# Altium PCB Header-Male-2.54_2x20.pcbdoc
Units mm, origin at the board's own origin, x right, y up, seen from the top; angles counter-clockwise.
Board outline 63.56 x 17.8 mm, 2 copper layers (Top Layer, Bottom Layer), stack 0 mm thick; 1 components, 0 nets, 40 pads, 0 vias.
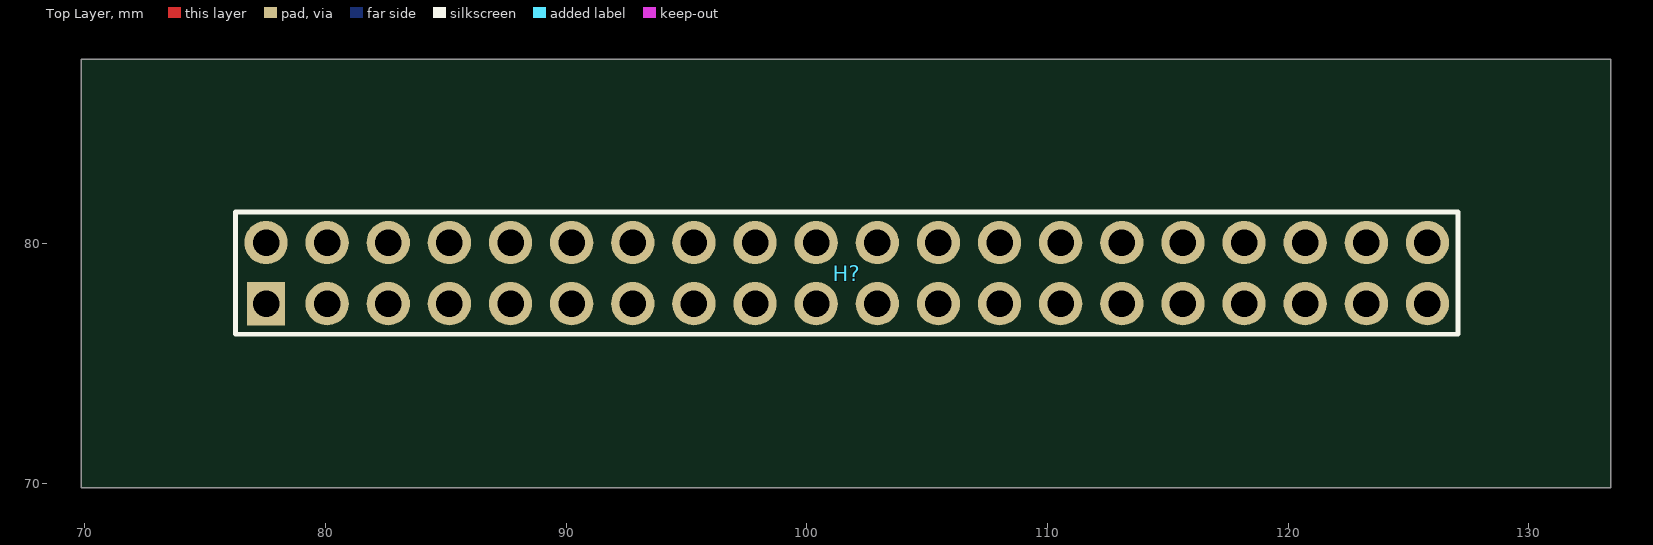
[diagram p0: Top Layer view]
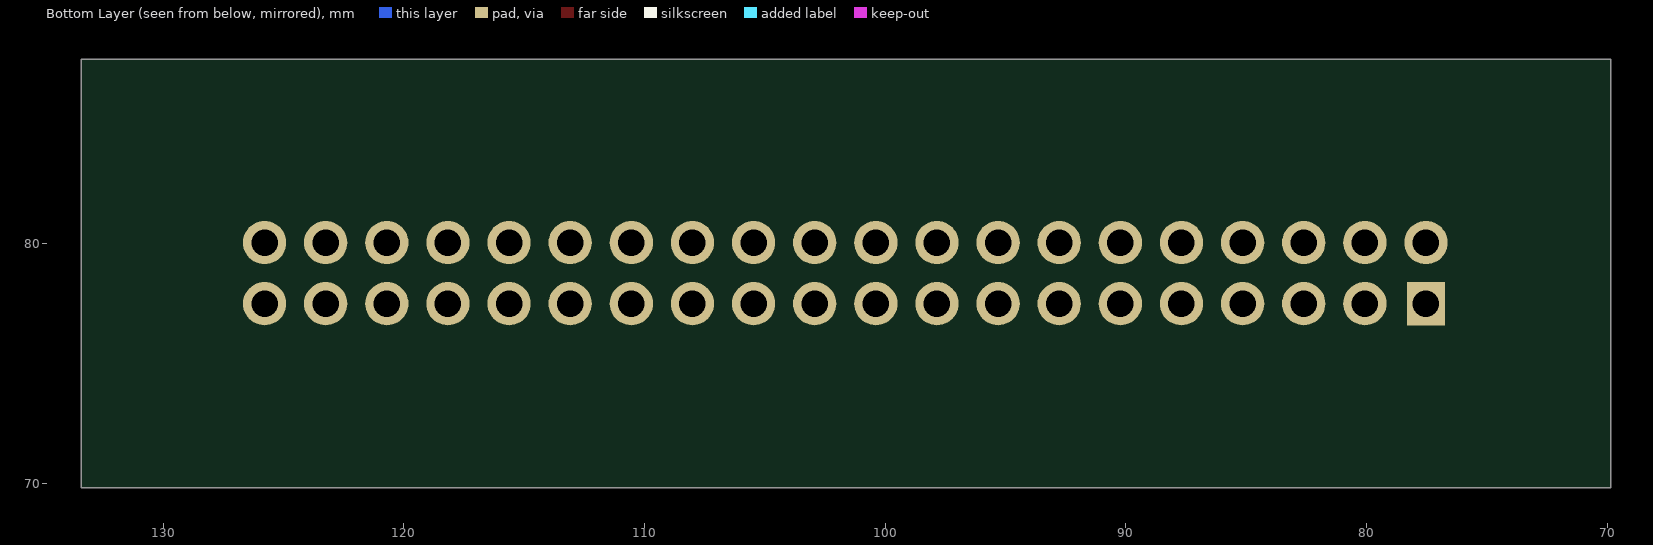
[diagram p1: Bottom Layer view, seen from below]

## Layer stack, top to bottom
Top Layer: signal copper (thickness not stored)
Bottom Layer: signal copper (thickness not stored)

## Board outline
133.411,69.85 69.85,69.85 69.85,87.65 133.411,87.65

## Components (designator, comment, footprint, x,y, rotation, side; value= is the part's Value field where it differs from the comment)
H? "2.54mm 2*20P直排针" HDR-TH_40P-P2.54-V-M-R2-C20-S2.54 101.661,78.76 r0 top

## Footprints (in the part's own frame and the unit in brackets; to place one, negate y for a bottom-side part, rotate by r counter-clockwise, add the part's x,y. Pads: shape width x height; smd on the part's side, far side on the other; paste and mask are expansions set on the pad)
HDR-TH_40P-P2.54-V-M-R2-C20-S2.54 [mil]
  rect 62x70.9 hole 43.3: 1(-950,-50)
  round 70.9 hole 43.3: 2(-950,50) 3(-850,-50) 4(-850,50) 5(-750,-50) 6(-750,50) 7(-650,-50) 8(-650,50) 9(-550,-50) 10(-550,50) 11(-450,-50) 12(-450,50) 13(-350,-50) 14(-350,50) 15(-250,-50) 16(-250,50) 17(-150,-50) 18(-150,50) 19(-50,-50) 20(-50,50) 21(50,-50) 22(50,50) 23(150,-50) 24(150,50) 25(250,-50) 26(250,50) 27(350,-50) 28(350,50) 29(450,-50) 30(450,50) 31(550,-50) 32(550,50) 33(650,-50) 34(650,50) 35(750,-50) 36(750,50) 37(850,-50) 38(850,50) 39(950,-50) 40(950,50)
  silkscreen extent -1000,-100 1000,100

## Nets (pads, with @x,y where several pads share a name; then routed paths per layer and width w, separated by ;. In a path a pad name is that pad's centre, name@x,y a point inside that pad or via, vN(x,y) a via of type N, cw(c..) or ccw(c..) an arc to the next point about the centre after c; other vN are vias at no path point)
pads on no net: H?.1 H?.2 H?.3 H?.4 H?.5 H?.6 H?.7 H?.8 H?.9 H?.10 H?.11 H?.12 H?.13 H?.14 H?.15 H?.16 H?.17 H?.18 H?.19 H?.20 H?.21 H?.22 H?.23 H?.24 H?.25 H?.26 H?.27 H?.28 H?.29 H?.30 H?.31 H?.32 H?.33 H?.34 H?.35 H?.36 H?.37 H?.38 H?.39 H?.40